# EAGLE board cpc_backplane_edge (EAGLE 6.4)
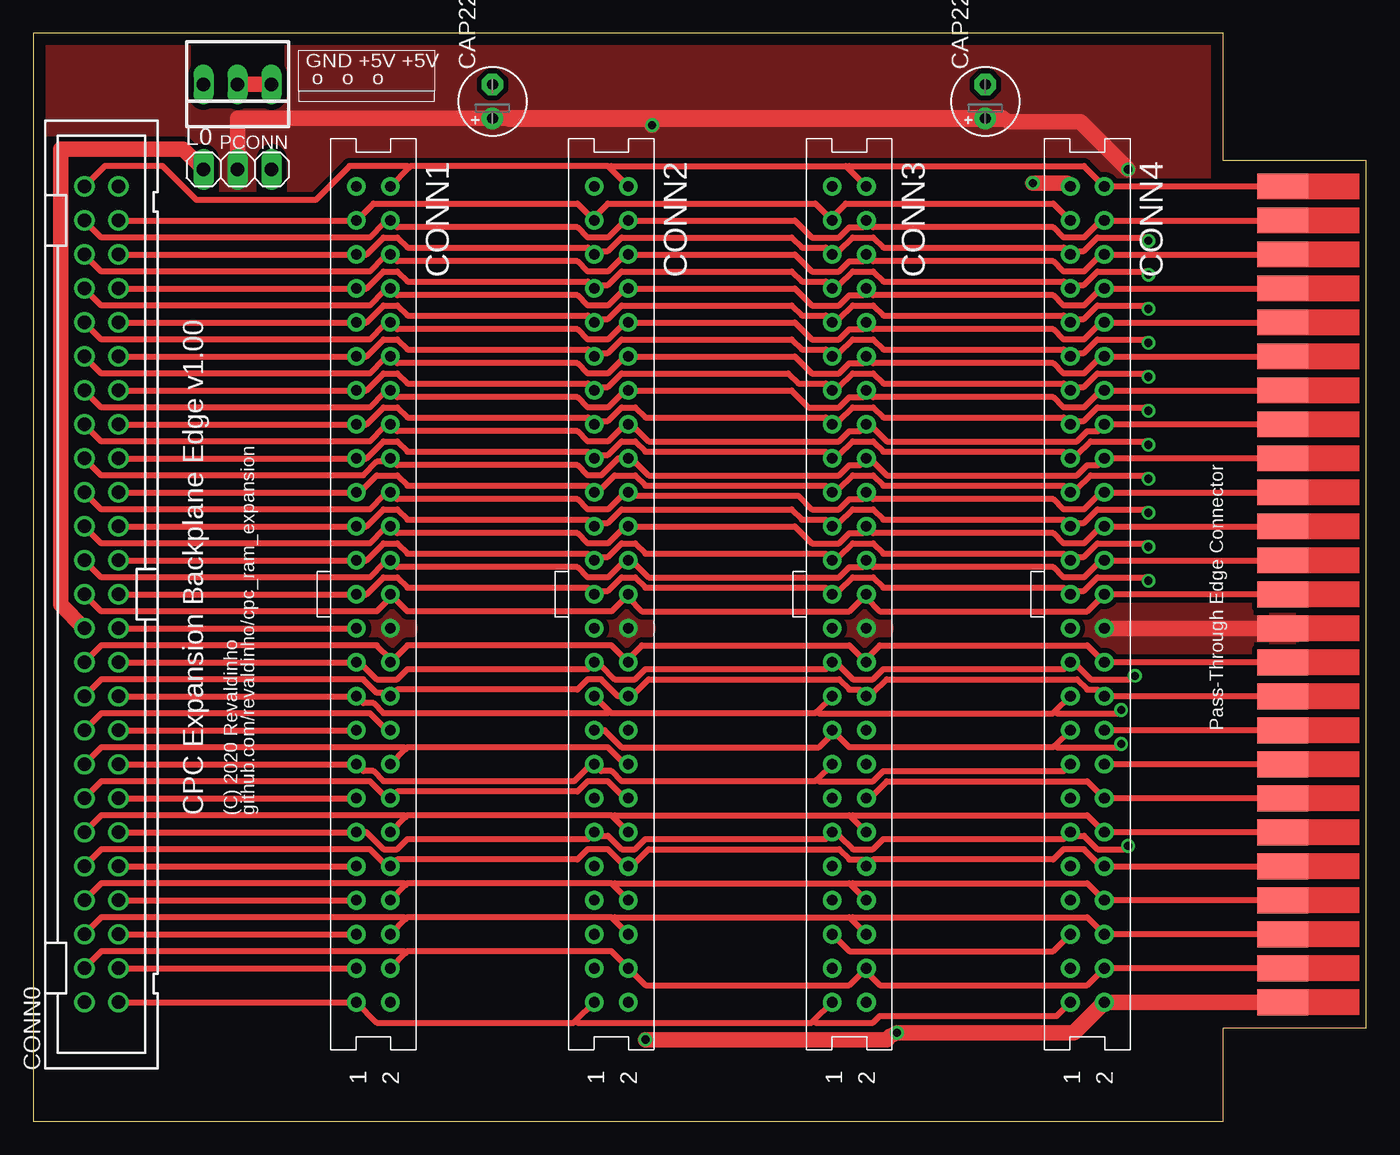
[diagram p0: board, top side]
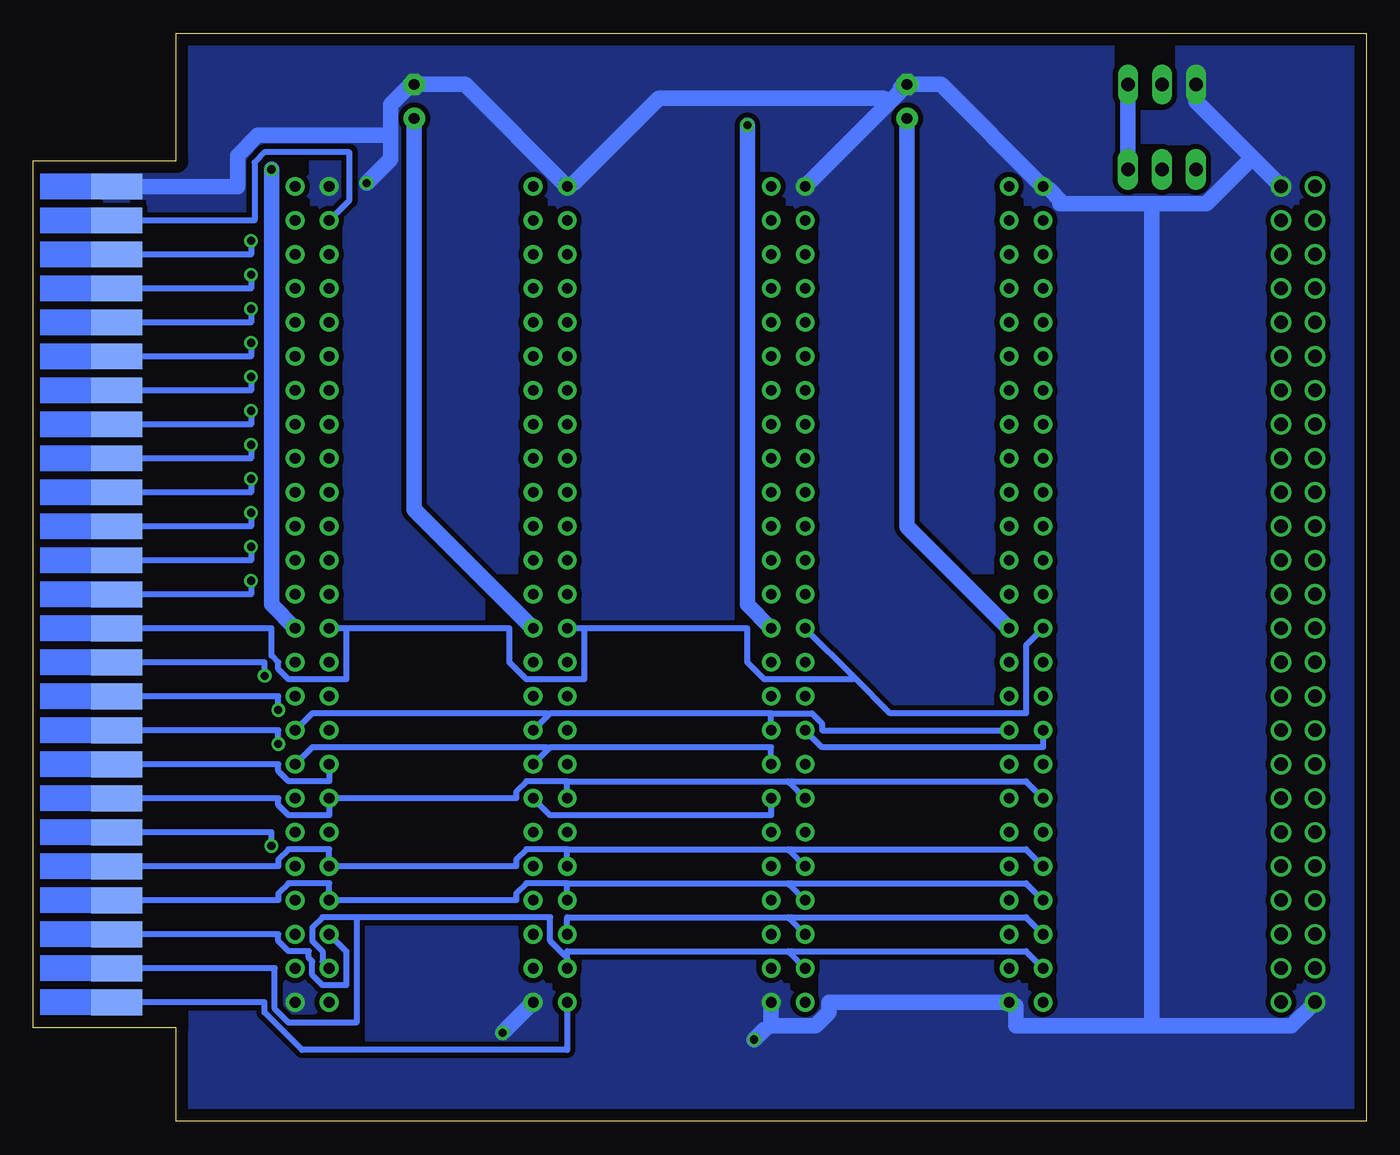
[diagram p1: board, bottom side, seen from below]

Size 99.57 x 81.28 mm. Coordinates in mm from the lower left corner, seen from the top.
Outline: 0,0 88.9,0 88.9,6.99 99.57,6.99 99.57,71.75 88.9,71.75 88.9,81.28 0,81.28 0,0
Copper layers (1*16): Top 0.035mm / dielectric 1.5mm / Bottom 0.035mm
Design rules "default *": minimum track width 10mil, minimum drill 24mil, track to track 8mil, track to pad 8mil, pad to pad 8mil, via to via 8mil, smd to smd 8mil, copper to edge 35mil, drill to drill 8mil, minimum pad ring 10mil, minimum via ring 8mil, stop-mask expansion 4mil, vias tented up to drill 0mil, thermal gap 10mil
Net classes: 0 signal: width 0.457 mm, clearance 0.254 mm; 1 supply: width 1.143 mm, clearance 0.381 mm

## Footprints (pad centres in the part's own frame; a part is rotated, then mirrored left to right if it is on the bottom)
E2,5-5 = drill 0.813 pad 1.6: + -1.27,0 | drill 0.813 pad 1.6 octagon: - 1.27,0
PAK100/2500-50 = drill 1 pad 1.422: 1 -30.48,-1.27; 2 -30.48,1.27; 3 -27.94,-1.27; 4 -27.94,1.27; 5 -25.4,-1.27; 6 -25.4,1.27; 7 -22.86,-1.27; 8 -22.86,1.27; 9 -20.32,-1.27; 10 -20.32,1.27; 11 -17.78,-1.27; 12 -17.78,1.27; 13 -15.24,-1.27; 14 -15.24,1.27; 15 -12.7,-1.27; 16 -12.7,1.27; 17 -10.16,-1.27; 18 -10.16,1.27; 19 -7.62,-1.27; 20 -7.62,1.27; 21 -5.08,-1.27; 22 -5.08,1.27; 23 -2.54,-1.27; 24 -2.54,1.27; 25 0,-1.27; 26 0,1.27; 27 2.54,-1.27; 28 2.54,1.27; 29 5.08,-1.27; 30 5.08,1.27; 31 7.62,-1.27; 32 7.62,1.27; 33 10.16,-1.27; 34 10.16,1.27; 35 12.7,-1.27; 36 12.7,1.27; 37 15.24,-1.27; 38 15.24,1.27; 39 17.78,-1.27; 40 17.78,1.27; 41 20.32,-1.27; 42 20.32,1.27; 43 22.86,-1.27; 44 22.86,1.27; 45 25.4,-1.27; 46 25.4,1.27; 47 27.94,-1.27; 48 27.94,1.27; 49 30.48,-1.27; 50 30.48,1.27
S50V = drill 0.8 pad 1.4: 1 30.48,-1.27; 2 30.48,1.27; 3 27.94,-1.27; 4 27.94,1.27; 5 25.4,-1.27; 6 25.4,1.27; 7 22.86,-1.27; 8 22.86,1.27; 9 20.32,-1.27; 10 20.32,1.27; 11 17.78,-1.27; 12 17.78,1.27; 13 15.24,-1.27; 14 15.24,1.27; 15 12.7,-1.27; 16 12.7,1.27; 17 10.16,-1.27; 18 10.16,1.27; 19 7.62,-1.27; 20 7.62,1.27; 21 5.08,-1.27; 22 5.08,1.27; 23 2.54,-1.27; 24 2.54,1.27; 25 0,-1.27; 26 0,1.27; 27 -2.54,-1.27; 28 -2.54,1.27; 29 -5.08,-1.27; 30 -5.08,1.27; 31 -7.62,-1.27; 32 -7.62,1.27; 33 -10.16,-1.27; 34 -10.16,1.27; 35 -12.7,-1.27; 36 -12.7,1.27; 37 -15.24,-1.27; 38 -15.24,1.27; 39 -17.78,-1.27; 40 -17.78,1.27; 41 -20.32,-1.27; 42 -20.32,1.27; 43 -22.86,-1.27; 44 -22.86,1.27; 45 -25.4,-1.27; 46 -25.4,1.27; 47 -27.94,-1.27; 48 -27.94,1.27; 49 -30.48,-1.27; 50 -30.48,1.27
50WEDGE = smd 3.81 x 1.93: P1 -4.445,13.97; P3 -4.445,11.43; P5 -4.445,8.89; P7 -4.445,6.35; P9 -4.445,3.81; P11 -4.445,1.27; P13 -4.445,-1.27; P15 -4.445,-3.81; P17 -4.445,-6.35; P19 -4.445,-8.89; P21 -4.445,-11.43; P23 -4.445,-13.97; P25 -4.445,-16.51; P27 -4.445,-19.05; P29 -4.445,-21.59; P31 -4.445,-24.13; P33 -4.445,-26.67; P35 -4.445,-29.21; P37 -4.445,-31.75; P39 -4.445,-34.29; P41 -4.445,-36.83; P43 -4.445,-39.37; P45 -4.445,-41.91; P47 -4.445,-44.45; P49 -4.445,-46.99 | smd 3.81 x 1.93 bottom: P2 -4.445,13.97; P4 -4.445,11.43; P6 -4.445,8.89; P8 -4.445,6.35; P10 -4.445,3.81; P12 -4.445,1.27; P14 -4.445,-1.27; P16 -4.445,-3.81; P18 -4.445,-6.35; P20 -4.445,-8.89; P22 -4.445,-11.43; P24 -4.445,-13.97; P26 -4.445,-16.51; P28 -4.445,-19.05; P30 -4.445,-21.59; P32 -4.445,-24.13; P34 -4.445,-26.67; P36 -4.445,-29.21; P38 -4.445,-31.75; P40 -4.445,-34.29; P42 -4.445,-36.83; P44 -4.445,-39.37; P46 -4.445,-41.91; P48 -4.445,-44.45; P50 -4.445,-46.99
1X03 = drill 1.016 long: 1 -2.54,0; 2 0,0; 3 2.54,0
22-23-2031 = drill 1 long: 1 -2.54,0; 2 0,0; 3 2.54,0

## Placement (x,y rotation side)
CAP22UF_0  [E2,5-5]  34.29,76.2 90 top
CAP22UF_1  [E2,5-5]  71.12,76.2 90 top
CONN0  [PAK100/2500-50]  5.08,39.37 90 top
CONN1  [S50V]  25.4,39.37 270 top
CONN2  [S50V]  43.18,39.37 270 top
CONN3  [S50V]  60.96,39.37 270 top
CONN4  [S50V]  78.74,39.37 270 top
CONN5  [50WEDGE]  97.79,55.88 0 top
L0  [1X03]  15.24,71.12 0 top
PCONN  [22-23-2031]  15.24,77.47 180 top

## Library data of the parts
CAP22UF_0 CAP22UF_1 = resistor
CONN0 = con-3m
CONN1-CONN4 = con-3m-skt-header
CONN5 = 50WEDGE
L0 = pinhead
PCONN = con-molex

## Nets
A0: CONN0.33 CONN1.33 CONN2.33 CONN3.33 CONN4.33 CONN5.P18
A1: CONN0.34 CONN1.34 CONN2.34 CONN3.34 CONN4.34 CONN5.P17
A2: CONN0.35 CONN1.35 CONN2.35 CONN3.35 CONN4.35 CONN5.P16
A3: CONN0.36 CONN1.36 CONN2.36 CONN3.36 CONN4.36 CONN5.P15
A4: CONN0.37 CONN1.37 CONN2.37 CONN3.37 CONN4.37 CONN5.P14
A5: CONN0.38 CONN1.38 CONN2.38 CONN3.38 CONN4.38 CONN5.P13
A6: CONN0.39 CONN1.39 CONN2.39 CONN3.39 CONN4.39 CONN5.P12
A7: CONN0.40 CONN1.40 CONN2.40 CONN3.40 CONN4.40 CONN5.P11
A8: CONN0.41 CONN1.41 CONN2.41 CONN3.41 CONN4.41 CONN5.P10
A9: CONN0.42 CONN1.42 CONN2.42 CONN3.42 CONN4.42 CONN5.P9
A10: CONN0.43 CONN1.43 CONN2.43 CONN3.43 CONN4.43 CONN5.P8
A11: CONN0.44 CONN1.44 CONN2.44 CONN3.44 CONN4.44 CONN5.P7
A12: CONN0.45 CONN1.45 CONN2.45 CONN3.45 CONN4.45 CONN5.P6
A13: CONN0.46 CONN1.46 CONN2.46 CONN3.46 CONN4.46 CONN5.P5
A14: CONN0.47 CONN1.47 CONN2.47 CONN3.47 CONN4.47 CONN5.P4
A15: CONN0.48 CONN1.48 CONN2.48 CONN3.48 CONN4.48 CONN5.P3
BUSACK_B: CONN0.13 CONN1.13 CONN2.13 CONN3.13 CONN4.13 CONN5.P38
BUSRESET_B: CONN0.11 CONN1.11 CONN2.11 CONN3.11 CONN4.11 CONN5.P40
BUSRQ_B: CONN0.14 CONN1.14 CONN2.14 CONN3.14 CONN4.14 CONN5.P37
CLK: CONN0.1 CONN1.1 CONN2.1 CONN3.1 CONN4.1 CONN5.P50
CURSOR: CONN0.5 CONN1.5 CONN2.5 CONN3.5 CONN4.5 CONN5.P46
D0: CONN0.25 CONN1.25 CONN2.25 CONN3.25 CONN4.25 CONN5.P26
D1: CONN0.26 CONN1.26 CONN2.26 CONN3.26 CONN4.26 CONN5.P25
D2: CONN0.27 CONN1.27 CONN2.27 CONN3.27 CONN4.27 CONN5.P24
D3: CONN0.28 CONN1.28 CONN2.28 CONN3.28 CONN4.28 CONN5.P23
D4: CONN0.29 CONN1.29 CONN2.29 CONN3.29 CONN4.29 CONN5.P22
D5: CONN0.30 CONN1.30 CONN2.30 CONN3.30 CONN4.30 CONN5.P21
D6: CONN0.31 CONN1.31 CONN2.31 CONN3.31 CONN4.31 CONN5.P20
D7: CONN0.32 CONN1.32 CONN2.32 CONN3.32 CONN4.32 CONN5.P19
EXP_B: CONN0.3 CONN1.3 CONN2.3 CONN3.3 CONN4.3 CONN5.P48
HALT_B: CONN0.17 CONN1.17 CONN2.17 CONN3.17 CONN4.17 CONN5.P34
INT_B: CONN0.16 CONN1.16 CONN2.16 CONN3.16 CONN4.16 CONN5.P35
IOREQ_B: CONN0.20 CONN1.20 CONN2.20 CONN3.20 CONN4.20 CONN5.P31
LPEN: CONN0.4 CONN1.4 CONN2.4 CONN3.4 CONN4.4 CONN5.P47
M1_B: CONN0.22 CONN1.22 CONN2.22 CONN3.22 CONN4.22 CONN5.P29
MREQ_B: CONN0.23 CONN1.23 CONN2.23 CONN3.23 CONN4.23 CONN5.P28
NMI_B: CONN0.15 CONN1.15 CONN2.15 CONN3.15 CONN4.15 CONN5.P36
RAMDIS: CONN0.6 CONN1.6 CONN2.6 CONN3.6 CONN4.6 CONN5.P45
RAMRD_B: CONN0.7 CONN1.7 CONN2.7 CONN3.7 CONN4.7 CONN5.P44
RD_B: CONN0.19 CONN1.19 CONN2.19 CONN3.19 CONN4.19 CONN5.P32
READY: CONN0.12 CONN1.12 CONN2.12 CONN3.12 CONN4.12 CONN5.P39
RESET_B: CONN0.10 CONN1.10 CONN2.10 CONN3.10 CONN4.10 CONN5.P41
RFSH_B: CONN0.21 CONN1.21 CONN2.21 CONN3.21 CONN4.21 CONN5.P30
ROMDIS: CONN0.8 CONN1.8 CONN2.8 CONN3.8 CONN4.8 CONN5.P43
ROMEN_B: CONN0.9 CONN1.9 CONN2.9 CONN3.9 CONN4.9 CONN5.P42
SOUND: CONN0.50 CONN1.50 CONN2.50 CONN3.50 CONN4.50 CONN5.P1
VDD1 [supply]: CAP22UF_0.+ CAP22UF_1.+ CONN1.24 CONN2.24 CONN3.24 CONN4.24 CONN5.P27 L0.2
VDD_CPC [supply]: CONN0.24 L0.1
VDD_EXT [supply]: L0.3 PCONN.1 PCONN.2
VSS [supply]: CAP22UF_0.- CAP22UF_1.- CONN0.2 CONN0.49 CONN1.2 CONN1.49 CONN2.2 CONN2.49 CONN3.2 CONN3.49 CONN4.2 CONN4.49 CONN5.P2 CONN5.P49 PCONN.3
WR_B: CONN0.18 CONN1.18 CONN2.18 CONN3.18 CONN4.18 CONN5.P33

## Tracks (layer width: path | path; a pad name or v marks a point on that pad's centre or on a via)
A0  (via drill 0.61)
  Top 0.457: CONN0.33 CONN1.33 24.89,49.53 26.16,50.8 27.18,50.8 27.94,50.04 41.4,50.04 CONN2.33 41.91,49.78 42.93,49.78 43.94,50.8 44.96,50.8 45.72,50.04 59.18,50.04 CONN3.33 59.69,49.78 60.2,49.78 61.21,50.8 62.74,50.8 63.5,50.04 76.96,50.04 CONN4.33 77.47,49.78 77.98,49.78 78.99,50.8 83.06,50.8 v83.31,50.55
  Bottom 0.457: CONN5.P18 83.31,49.53 v83.31,50.55
A1
  Top 0.457: CONN5.P17 CONN4.34 79.5,49.02 78.74,49.02 77.98,48.26 63.75,48.26 62.74,49.28 62.23,49.28 CONN3.34 61.72,49.02 60.96,49.02 60.2,48.26 45.97,48.26 44.7,49.53 CONN2.34 43.69,49.53 42.42,48.26 41.4,48.26 40.64,49.02 27.18,49.02 CONN1.34 26.67,49.28 25.65,49.28 24.64,48.26 5.08,48.26 CONN0.34
A2  (via drill 0.61)
  Top 0.457: CONN0.35 CONN1.35 24.89,52.07 26.16,53.34 27.18,53.34 27.94,52.58 41.4,52.58 CONN2.35 41.91,52.32 42.93,52.32 43.94,53.34 44.96,53.34 45.72,52.58 59.18,52.58 CONN3.35 59.69,52.32 60.2,52.32 61.21,53.34 62.74,53.34 63.5,52.58 76.96,52.58 CONN4.35 77.47,52.32 78.49,52.32 79.5,53.34 83.06,53.34 v83.31,53.09
  Bottom 0.457: CONN5.P16 83.31,52.07 v83.31,53.09
A3
  Top 0.457: CONN5.P15 CONN4.36 79.5,51.56 78.74,51.56 77.98,50.8 63.75,50.8 62.74,51.82 62.23,51.82 CONN3.36 61.72,51.56 60.96,51.56 60.2,50.8 45.97,50.8 44.7,52.07 CONN2.36 44.2,52.07 42.93,50.8 41.4,50.8 40.64,51.56 27.18,51.56 CONN1.36 26.67,51.82 26.16,51.82 25.15,50.8 5.08,50.8 CONN0.36
A4  (via drill 0.61)
  Top 0.457: CONN0.37 CONN1.37 24.89,54.61 26.16,55.88 27.18,55.88 27.94,55.12 41.4,55.12 CONN2.37 41.91,54.86 42.93,54.86 43.94,55.88 56.39,55.88 57.15,55.12 59.18,55.12 CONN3.37 59.69,54.86 60.2,54.86 61.21,55.88 62.74,55.88 63.5,55.12 76.96,55.12 CONN4.37 77.47,54.86 78.49,54.86 79.5,55.88 83.06,55.88 v83.31,55.63
  Bottom 0.457: CONN5.P14 83.31,54.61 v83.31,55.63
A5
  Top 0.457: CONN5.P13 CONN4.38 79.76,54.61 78.49,53.34 76.96,53.34 76.2,54.1 62.74,54.1 CONN3.38 62.23,54.36 61.98,54.1 60.96,54.1 60.2,53.34 57.91,53.34 56.64,54.61 CONN2.38 44.2,54.61 42.93,53.34 41.4,53.34 40.64,54.1 27.18,54.1 CONN1.38 26.67,54.36 26.16,54.36 25.15,53.34 5.08,53.34 CONN0.38
A6  (via drill 0.61)
  Top 0.457: CONN0.39 CONN1.39 24.89,57.15 26.16,58.42 27.18,58.42 27.94,57.66 41.4,57.66 CONN2.39 41.91,57.4 42.93,57.4 43.94,58.42 56.64,58.42 57.4,57.66 59.18,57.66 CONN3.39 59.69,57.4 60.2,57.4 61.21,58.42 62.74,58.42 63.5,57.66 76.96,57.66 CONN4.39 77.47,57.4 78.49,57.4 79.5,58.42 83.06,58.42 v83.31,58.17
  Bottom 0.457: CONN5.P12 83.31,57.15 v83.31,58.17
A7
  Top 0.457: CONN5.P11 CONN4.40 79.76,57.15 78.49,55.88 76.96,55.88 76.2,56.64 62.74,56.64 CONN3.40 62.23,56.9 61.98,56.64 60.96,56.64 60.2,55.88 58.17,55.88 56.9,57.15 CONN2.40 44.2,57.15 42.93,55.88 41.4,55.88 40.64,56.64 27.18,56.64 CONN1.40 26.67,56.9 26.16,56.9 25.15,55.88 5.08,55.88 CONN0.40
A8  (via drill 0.61)
  Top 0.457: CONN0.41 CONN1.41 24.89,59.69 26.16,60.96 27.18,60.96 27.94,60.2 41.4,60.2 CONN2.41 41.91,59.94 42.93,59.94 43.94,60.96 56.64,60.96 57.4,60.2 59.18,60.2 CONN3.41 59.69,59.94 60.2,59.94 61.21,60.96 62.74,60.96 63.5,60.2 76.96,60.2 CONN4.41 77.47,59.94 78.49,59.94 79.5,60.96 83.06,60.96 v83.31,60.71
  Bottom 0.457: CONN5.P10 83.31,59.69 v83.31,60.71
A9
  Top 0.457: CONN5.P9 CONN4.42 79.76,59.69 78.49,58.42 76.96,58.42 76.2,59.18 62.74,59.18 CONN3.42 62.23,59.44 61.98,59.18 60.96,59.18 60.2,58.42 58.17,58.42 56.9,59.69 CONN2.42 44.2,59.69 42.93,58.42 41.4,58.42 40.64,59.18 27.18,59.18 CONN1.42 26.67,59.44 26.16,59.44 25.15,58.42 5.08,58.42 CONN0.42
A10  (via drill 0.61)
  Top 0.457: CONN0.43 CONN1.43 24.89,62.23 26.16,63.5 27.18,63.5 27.94,62.74 41.4,62.74 CONN2.43 41.91,62.48 42.93,62.48 43.94,63.5 56.64,63.5 57.4,62.74 59.18,62.74 CONN3.43 59.69,62.48 60.2,62.48 61.21,63.5 62.74,63.5 63.5,62.74 76.96,62.74 CONN4.43 77.47,62.48 78.49,62.48 79.5,63.5 83.06,63.5 v83.31,63.25
  Bottom 0.457: CONN5.P8 83.31,62.23 v83.31,63.25
A11
  Top 0.457: CONN5.P7 CONN4.44 79.76,62.23 78.49,60.96 76.96,60.96 76.2,61.72 62.74,61.72 CONN3.44 62.23,61.98 61.98,61.72 60.96,61.72 60.2,60.96 58.17,60.96 56.9,62.23 CONN2.44 44.2,62.23 42.93,60.96 41.4,60.96 40.64,61.72 27.18,61.72 CONN1.44 26.67,61.98 26.16,61.98 25.15,60.96 5.08,60.96 CONN0.44
A12  (via drill 0.61)
  Top 0.457: CONN0.45 CONN1.45 24.89,64.77 26.16,66.04 27.18,66.04 27.94,65.28 41.4,65.28 CONN2.45 41.91,65.02 42.93,65.02 43.94,66.04 56.64,66.04 57.4,65.28 59.18,65.28 CONN3.45 59.69,65.02 60.2,65.02 61.21,66.04 62.74,66.04 63.5,65.28 76.96,65.28 CONN4.45 77.47,65.02 78.49,65.02 79.5,66.04 83.06,66.04 v83.31,65.79
  Bottom 0.457: CONN5.P6 83.31,64.77 v83.31,65.79
A13
  Top 0.457: CONN5.P5 CONN4.46 79.76,64.77 78.49,63.5 76.96,63.5 76.2,64.26 62.74,64.26 CONN3.46 62.23,64.52 61.98,64.26 60.96,64.26 60.2,63.5 58.17,63.5 56.9,64.77 CONN2.46 44.2,64.77 42.93,63.5 41.4,63.5 40.64,64.26 27.18,64.26 CONN1.46 26.67,64.52 26.16,64.52 25.15,63.5 5.08,63.5 CONN0.46
A14
  Top 0.457: CONN0.47 CONN1.47 25.4,68.58 40.64,68.58 CONN2.47 41.91,67.56 42.93,68.58 58.42,68.58 CONN3.47 59.69,67.56 60.71,68.58 76.2,68.58 CONN4.47
  Bottom 0.457: CONN5.P4 83.06,67.31 83.06,71.63 82.3,72.39 75.95,72.39 75.95,68.83 CONN4.47
A15
  Top 0.457: CONN5.P3 CONN4.48 79.76,67.31 78.49,66.04 76.96,66.04 76.2,66.8 62.74,66.8 CONN3.48 62.23,67.06 61.98,66.8 60.96,66.8 60.2,66.04 58.17,66.04 56.9,67.31 CONN2.48 44.2,67.31 42.93,66.04 41.4,66.04 40.64,66.8 27.18,66.8 CONN1.48 26.67,67.06 26.16,67.06 25.15,66.04 5.08,66.04 CONN0.48
BUSACK_B
  Top 0.457: CONN0.13 CONN1.13
  Bottom 0.457: 43.05,25.27 43.18,25.4 59.69,25.4 | 43.05,25.27 CONN2.13 | CONN3.13 59.69,25.4 | 59.69,25.4 62.74,25.4 63.5,24.64 63.5,24.13 CONN4.13 77.47,22.86 80.52,22.86 81.28,23.62 81.28,24.13 CONN5.P38 | CONN1.13 25.4,25.4 42.93,25.4 43.05,25.27
BUSRESET_B  (via drill 0.61)
  Top 0.457: CONN0.11 CONN1.11 24.89,21.59 26.16,20.32 27.18,20.32 27.94,21.08 41.4,21.08 CONN2.11 41.91,21.34 42.93,21.34 43.94,20.32 44.96,20.32 45.72,21.08 59.18,21.08 CONN3.11 59.69,21.34 60.2,21.34 61.21,20.32 62.74,20.32 63.5,21.08 76.96,21.08 CONN4.11 77.47,21.34 78.49,21.34 79.5,20.32 81.53,20.32 v81.79,20.57
  Bottom 0.457: CONN5.P40 81.79,21.59 v81.79,20.57
BUSRQ_B
  Top 0.457: CONN5.P37 CONN4.14 78.74,25.4 63.75,25.4 62.48,24.13 CONN3.14 | CONN2.14 44.2,24.13 42.93,25.4 41.4,25.4 40.64,24.64 27.18,24.64 CONN1.14 26.67,24.38 26.16,24.38 25.15,25.4 5.08,25.4 CONN0.14
  Bottom 0.457: CONN3.14 60.96,22.86 44.45,22.86 CONN2.14
CLK
  Top 0.457: CONN0.1 CONN1.1 25.65,7.37 40.39,7.37 40.51,7.49 | 40.51,7.49 CONN2.1 | 58.29,7.49 58.17,7.37 40.64,7.37 40.51,7.49 | 58.29,7.49 CONN3.1 | CONN4.1 76.45,7.87 63.25,7.87 62.74,7.37 58.42,7.37 58.29,7.49
  Bottom 0.457: CONN5.P50 82.3,8.89 82.3,8.13 79.5,5.33 59.69,5.33 CONN3.1
CURSOR
  Top 0.457: CONN0.5 CONN1.5 | CONN4.5 76.2,12.7 60.96,12.7 CONN3.5
  Bottom 0.457: 43.05,15.11 43.18,15.24 59.69,15.24 CONN3.5 | 43.05,15.11 CONN2.5 | CONN5.P46 81.28,13.97 81.28,13.46 80.52,12.7 78.99,12.7 78.99,12.19 78.74,11.94 78.74,10.92 77.98,10.16 76.2,10.16 76.2,12.7 CONN4.5 | CONN1.5 25.4,15.24 42.93,15.24 43.05,15.11
D0  (via drill 0.61)
  Top 0.457: CONN0.25 CONN1.25 24.89,39.37 26.16,40.64 27.18,40.64 27.94,39.88 41.4,39.88 CONN2.25 41.91,39.62 42.93,39.62 43.94,40.64 44.96,40.64 45.72,39.88 59.18,39.88 CONN3.25 59.69,39.62 60.2,39.62 61.21,40.64 62.74,40.64 63.5,39.88 76.96,39.88 CONN4.25 77.47,39.62 78.49,39.62 79.5,40.64 83.06,40.64 v83.31,40.39
  Bottom 0.457: CONN5.P26 83.31,39.37 v83.31,40.39
D1
  Top 0.457: CONN5.P25 CONN4.26 78.74,38.1 63.25,38.1 62.23,39.12 CONN3.26 60.96,38.1 45.47,38.1 44.45,39.12 CONN2.26 43.18,38.1 27.94,38.1 CONN1.26 26.67,39.12 25.65,38.1 5.08,38.1 CONN0.26
D2  (via drill 0.61)
  Top 0.457: CONN0.27 CONN1.27 24.89,41.91 26.16,43.18 27.18,43.18 27.94,42.42 41.4,42.42 CONN2.27 41.91,42.16 42.93,42.16 43.94,43.18 44.96,43.18 45.72,42.42 59.18,42.42 CONN3.27 59.69,42.16 60.2,42.16 61.21,43.18 62.74,43.18 63.5,42.42 76.96,42.42 CONN4.27 77.47,42.16 78.49,42.16 79.5,43.18 83.06,43.18 v83.31,42.93
  Bottom 0.457: CONN5.P24 83.31,41.91 v83.31,42.93
D3
  Top 0.457: CONN5.P23 CONN4.28 79.76,41.91 78.49,40.64 76.96,40.64 76.2,41.4 62.74,41.4 CONN3.28 62.23,41.66 61.98,41.4 60.96,41.4 60.2,40.64 45.97,40.64 44.7,41.91 CONN2.28 44.2,41.91 42.93,40.64 41.4,40.64 40.64,41.4 27.18,41.4 CONN1.28 26.67,41.66 26.16,41.66 25.15,40.64 5.08,40.64 CONN0.28
D4  (via drill 0.61)
  Top 0.457: CONN0.29 CONN1.29 24.89,44.45 26.16,45.72 27.18,45.72 27.94,44.96 41.4,44.96 CONN2.29 41.91,44.7 42.93,44.7 43.94,45.72 56.64,45.72 57.4,44.96 59.18,44.96 CONN3.29 59.69,44.7 60.2,44.7 61.21,45.72 62.74,45.72 63.5,44.96 76.96,44.96 CONN4.29 77.47,44.7 78.49,44.7 79.5,45.72 83.06,45.72 v83.31,45.47
  Bottom 0.457: CONN5.P22 83.31,44.45 v83.31,45.47
D5
  Top 0.457: CONN5.P21 CONN4.30 79.76,44.45 78.49,43.18 76.96,43.18 76.2,43.94 62.74,43.94 CONN3.30 62.23,44.2 61.98,43.94 60.96,43.94 60.2,43.18 58.17,43.18 56.9,44.45 CONN2.30 44.2,44.45 42.93,43.18 41.4,43.18 40.64,43.94 27.18,43.94 CONN1.30 26.67,44.2 26.16,44.2 25.15,43.18 5.08,43.18 CONN0.30
D6  (via drill 0.61)
  Top 0.457: CONN0.31 CONN1.31 24.38,46.99 25.65,48.26 27.18,48.26 27.94,47.5 41.4,47.5 CONN2.31 41.91,47.24 42.42,47.24 43.43,48.26 44.96,48.26 45.72,47.5 59.18,47.5 CONN3.31 59.69,47.24 60.2,47.24 61.21,48.26 62.74,48.26 63.5,47.5 76.96,47.5 CONN4.31 77.47,47.24 77.98,47.24 78.99,48.26 83.06,48.26 v83.31,48.01
  Bottom 0.457: CONN5.P20 83.31,46.99 v83.31,48.01
D7
  Top 0.457: CONN5.P19 CONN4.32 79.76,46.99 78.49,45.72 76.96,45.72 76.2,46.48 62.74,46.48 CONN3.32 62.23,46.74 61.98,46.48 60.96,46.48 60.2,45.72 58.17,45.72 57.15,46.74 44.2,46.74 CONN2.32 44.2,46.99 42.93,45.72 41.4,45.72 40.64,46.48 27.18,46.48 CONN1.32 26.67,46.74 26.16,46.74 25.15,45.72 5.08,45.72 CONN0.32
EXP_B
  Top 0.457: CONN0.3 CONN1.3
  Bottom 0.457: 43.05,12.57 43.18,12.7 59.69,12.7 59.69,12.19 | 43.05,12.57 CONN2.3 | CONN3.3 59.69,12.19 | CONN4.3 77.98,11.94 77.98,12.7 78.74,13.46 78.74,14.48 77.98,15.24 75.44,15.24 | 75.44,15.24 60.96,15.24 60.96,13.46 59.69,12.19 | CONN5.P48 81.53,11.43 81.53,8.38 80.52,7.37 75.44,7.37 75.44,15.24 | CONN1.3 25.4,12.7 42.93,12.7 43.05,12.57
HALT_B  (via drill 0.61)
  Top 0.457: CONN4.17 76.33,28.07 | 76.33,28.07 76.2,27.94 60.96,27.94 CONN3.17 59.69,28.96 58.67,27.94 43.94,27.94 42.67,29.21 CONN2.17 | v81.28,28.19 81.03,27.94 76.45,27.94 76.33,28.07 | CONN0.17 CONN1.17
  Bottom 0.457: CONN5.P34 81.28,29.21 v81.28,28.19 | CONN2.17 40.64,27.94 24.13,27.94 CONN1.17
INT_B
  Top 0.457: CONN5.P35 CONN4.16 | 27.81,27.81 27.94,27.94 42.93,27.94 44.2,26.67 CONN2.16 | 27.81,27.81 CONN1.16 | CONN0.16 5.08,27.94 27.69,27.94 27.81,27.81
  Bottom 0.457: 61.09,27.81 60.96,27.94 44.45,27.94 CONN2.16 | 61.09,27.81 CONN3.16 | CONN4.16 78.74,27.94 61.21,27.94 61.09,27.81
IOREQ_B
  Top 0.457: CONN5.P31 CONN4.20 79.5,32.26 78.74,32.26 77.98,33.02 63.75,33.02 62.74,32 62.23,32 CONN3.20 61.72,32.26 60.96,32.26 60.2,33.02 45.97,33.02 44.7,31.75 CONN2.20 43.69,31.75 42.42,33.02 41.4,33.02 40.64,32.26 27.18,32.26 CONN1.20 26.67,32 25.65,32 24.64,33.02 5.08,33.02 CONN0.20
LPEN
  Top 0.457: CONN5.P47 CONN4.4 78.74,10.16 63.25,10.16 62.23,11.18 CONN3.4 60.96,10.16 45.72,10.16 CONN2.4 43.18,12.7 27.94,12.7 27.81,12.57 | 27.81,12.57 CONN1.4 | CONN0.4 5.08,12.7 27.69,12.7 27.81,12.57
M1_B
  Top 0.457: CONN5.P29 CONN4.22 78.74,35.56 63.25,35.56 62.23,34.54 CONN3.22 60.96,35.56 45.47,35.56 44.45,34.54 CONN2.22 43.18,35.56 27.94,35.56 CONN1.22 26.67,34.54 25.65,35.56 5.08,35.56 CONN0.22
MREQ_B
  Top 0.457: CONN0.23 CONN1.23
  Bottom 0.457: 38.23,33.15 35.56,30.48 25.4,30.48 25.4,35.56 CONN1.23 | 38.23,33.15 CONN2.23 | 58.42,36.83 46.23,36.83 46.23,34.29 44.96,33.02 38.35,33.02 38.23,33.15 | 58.42,36.83 CONN3.23 | 76.2,36.83 64.01,36.83 64.01,34.29 62.74,33.02 58.42,33.02 58.42,36.83 | 76.2,36.83 CONN4.23 | CONN5.P28 81.79,36.83 81.79,34.8 81.28,34.29 81.28,33.78 80.52,33.02 76.2,33.02 76.2,36.83
NMI_B
  Top 0.457: CONN0.15 CONN1.15 24.64,26.16 25.4,26.16 26.16,25.4 40.39,25.4 41.4,26.42 41.91,26.42 CONN2.15 42.42,26.16 43.18,26.16 43.94,25.4 58.42,25.4 58.55,25.53 | CONN3.15 58.55,25.53 | CONN4.15 76.96,26.16 63.5,26.16 62.74,25.4 58.67,25.4 58.55,25.53
  Bottom 0.457: CONN5.P36 81.28,26.67 81.28,26.16 80.52,25.4 77.47,25.4 CONN4.15
RAMDIS
  Top 0.457: CONN5.P45 CONN4.6 78.74,15.24 61.21,15.24 61.09,15.11 | 27.81,15.11 27.94,15.24 43.18,15.24 43.31,15.11 | 27.81,15.11 CONN1.6 | CONN2.6 43.31,15.11 | 61.09,15.11 60.96,15.24 43.43,15.24 43.31,15.11 | 61.09,15.11 CONN3.6 | CONN0.6 5.08,15.24 27.69,15.24 27.81,15.11
RAMRD_B
  Top 0.457: CONN0.7 CONN1.7
  Bottom 0.457: 43.05,17.65 43.18,17.78 59.69,17.78 | 43.05,17.65 CONN2.7 | CONN3.7 59.69,17.78 | 59.69,17.78 62.74,17.78 63.5,17.02 63.5,16.51 CONN4.7 77.47,17.78 80.52,17.78 81.28,17.02 81.28,16.51 CONN5.P44 | CONN1.7 25.4,17.78 42.93,17.78 43.05,17.65
RD_B  (via drill 0.61)
  Top 0.457: CONN0.19 CONN1.19 24.64,31.24 25.4,31.24 26.16,30.48 42.93,30.48 43.05,30.61 | 43.05,30.61 43.18,30.48 58.42,30.48 58.55,30.61 | 43.05,30.61 CONN2.19 | CONN3.19 58.55,30.61 | 76.33,30.61 76.2,30.48 58.67,30.48 58.55,30.61 | 76.33,30.61 CONN4.19 | v81.28,30.73 81.03,30.48 76.45,30.48 76.33,30.61
  Bottom 0.457: CONN5.P32 81.28,31.75 v81.28,30.73
READY
  Top 0.457: CONN5.P39 CONN4.12 78.74,22.86 61.21,22.86 61.09,22.73 | 27.81,22.73 27.94,22.86 43.18,22.86 43.31,22.73 | 27.81,22.73 CONN1.12 | CONN2.12 43.31,22.73 | 61.09,22.73 60.96,22.86 43.43,22.86 43.31,22.73 | 61.09,22.73 CONN3.12 | CONN0.12 5.08,22.86 27.69,22.86 27.81,22.73
RESET_B
  Top 0.457: CONN5.P41 CONN4.10 79.76,19.05 78.49,20.32 76.96,20.32 76.2,19.56 62.74,19.56 CONN3.10 62.23,19.3 61.98,19.56 60.96,19.56 60.2,20.32 45.97,20.32 44.7,19.05 CONN2.10 44.2,19.05 42.93,20.32 41.4,20.32 40.64,19.56 27.18,19.56 CONN1.10 26.67,19.3 26.16,19.3 25.15,20.32 5.08,20.32 CONN0.10
RFSH_B  (via drill 0.61)
  Top 0.457: CONN0.21 CONN1.21 24.38,34.29 25.65,33.02 27.18,33.02 27.94,33.78 41.4,33.78 CONN2.21 41.91,34.04 42.42,34.04 43.43,33.02 44.96,33.02 45.72,33.78 59.18,33.78 CONN3.21 59.69,34.04 60.2,34.04 61.21,33.02 62.74,33.02 63.5,33.78 76.96,33.78 CONN4.21 77.47,34.04 77.98,34.04 78.99,33.02 82.04,33.02 v82.3,33.27
  Bottom 0.457: CONN5.P30 82.3,34.29 v82.3,33.27
ROMDIS
  Top 0.457: CONN5.P43 CONN4.8 78.74,17.78 61.21,17.78 61.09,17.65 | 27.81,17.65 27.94,17.78 43.18,17.78 43.31,17.65 | 27.81,17.65 CONN1.8 | CONN2.8 43.31,17.65 | 61.09,17.65 60.96,17.78 43.43,17.78 43.31,17.65 | 61.09,17.65 CONN3.8 | CONN0.8 5.08,17.78 27.69,17.78 27.81,17.65
ROMEN_B
  Top 0.457: CONN0.9 CONN1.9
  Bottom 0.457: 43.05,20.19 43.18,20.32 59.69,20.32 | 43.05,20.19 CONN2.9 | CONN3.9 59.69,20.32 | 59.69,20.32 62.74,20.32 63.5,19.56 63.5,19.05 CONN4.9 77.47,20.32 80.52,20.32 81.28,19.56 81.28,19.05 CONN5.P42 | CONN1.9 25.4,20.32 42.93,20.32 43.05,20.19
SOUND
  Top 0.457: CONN5.P1 CONN4.50 78.49,71.37 60.96,71.37 60.83,71.25 | 28.07,71.25 28.19,71.37 42.93,71.37 43.05,71.25 | 28.07,71.25 CONN1.50 | CONN2.50 43.05,71.25 | 60.83,71.25 60.71,71.37 43.18,71.37 43.05,71.25 | 60.83,71.25 CONN3.50 | CONN0.50 5.33,71.37 9.65,71.37 12.19,68.83 21.08,68.83 23.62,71.37 27.94,71.37 28.07,71.25
VDD1  (via drill 0.61)
  Top 1.143: L0.2 15.24,74.93 CAP22UF_0.+ 35.56,74.93 | CONN5.P27 CONN4.24 | v46.23,74.42 46.23,74.93 | v81.79,71.12 78.23,74.68 72.9,74.68 72.39,74.93
  Top 1.27: 35.56,74.93 46.23,74.93 72.39,74.93
  Bottom 1.143: CONN1.24 34.29,44.45 CAP22UF_0.+ | CONN3.24 71.12,45.72 CAP22UF_1.+ | CONN2.24 46.23,38.61 v46.23,74.42 | CONN4.24 81.79,38.61 v81.79,71.12
  pour Top: 0,0 88.9,0 88.9,7.62 99.57,7.62 99.57,71.12 88.9,71.12 88.9,81.28 0,81.28
VDD_CPC
  Top 1.143: CONN0.24 2.03,38.61 2.03,72.64 11.18,72.64 L0.1
VDD_EXT
  Top 1.143: PCONN.1 PCONN.2
  Bottom 1.143: PCONN.1 L0.3
VSS  (via drill 0.61)
  Top 1.143: CONN5.P49 CONN4.2 77.72,6.6 v64.52,6.6 64.01,6.35 63.75,6.1 v45.72,6.1 | CONN4.49 77.22,70.1 v74.68,70.1
  Bottom 1.143: v64.52,6.6 CONN3.2 | 44.45,7.11 41.15,7.11 40.13,8.13 40.13,8.89 CONN1.2 26.16,8.64 26.16,7.11 16,7.11 | CONN2.2 44.45,7.11 | CONN0.2 5.59,7.11 16,7.11 | v45.72,6.1 44.96,6.86 44.45,7.11 | v74.68,70.1 72.9,71.88 72.9,73.66 | 72.9,73.66 72.9,75.95 71.63,77.22 CAP22UF_1.- 67.31,77.47 CONN3.49 59.18,70.1 52.83,76.45 36.07,76.45 35.69,76.07 | CONN5.P2 84.33,69.85 84.33,72.14 82.8,73.66 72.9,73.66 | 8.51,72.01 12.7,76.2 PCONN.3 | 8.51,72.01 CONN0.49 | 35.69,76.07 34.8,76.96 34.8,77.22 CAP22UF_0.- 31.75,77.47 CONN1.49 23.62,69.6 22.86,68.83 22.86,68.58 16,68.58 | 35.69,76.07 CONN2.49 | 8.51,72.01 11.94,68.58 16,68.58 | 16,68.58 16,7.11
  pour Bottom: 0,0 88.9,0 88.9,7.62 99.57,7.62 99.57,71.12 88.9,71.12 88.9,81.28 0,81.28
WR_B
  Top 0.457: CONN5.P33 CONN4.18 | CONN0.18 5.08,30.48 25.15,30.48 26.42,29.21 CONN1.18
  Bottom 0.457: CONN1.18 40.64,29.21 40.64,29.72 41.4,30.48 44.45,30.48 | CONN2.18 44.45,30.48 | 61.09,30.35 60.96,30.48 44.45,30.48 | 61.09,30.35 CONN3.18 | CONN4.18 78.74,30.48 61.21,30.48 61.09,30.35

## Text on the board
tPlace: GND +5V +5V | o o o | Pass-Through Edge Connector | CPC Expansion Backplane Edge v1.00 | (C) 2020 Revaldinho | github.com/revaldinho/cpc_ram_expansion